# Altium PCB QiCharger.PcbDoc
Units mm, origin at the board's own origin, x right, y up, seen from the top; angles counter-clockwise.
Board outline 35 x 55 mm, 2 copper layers (Top Layer, Bottom Layer); 38 components, 20 nets, 82 pads, 20 vias.
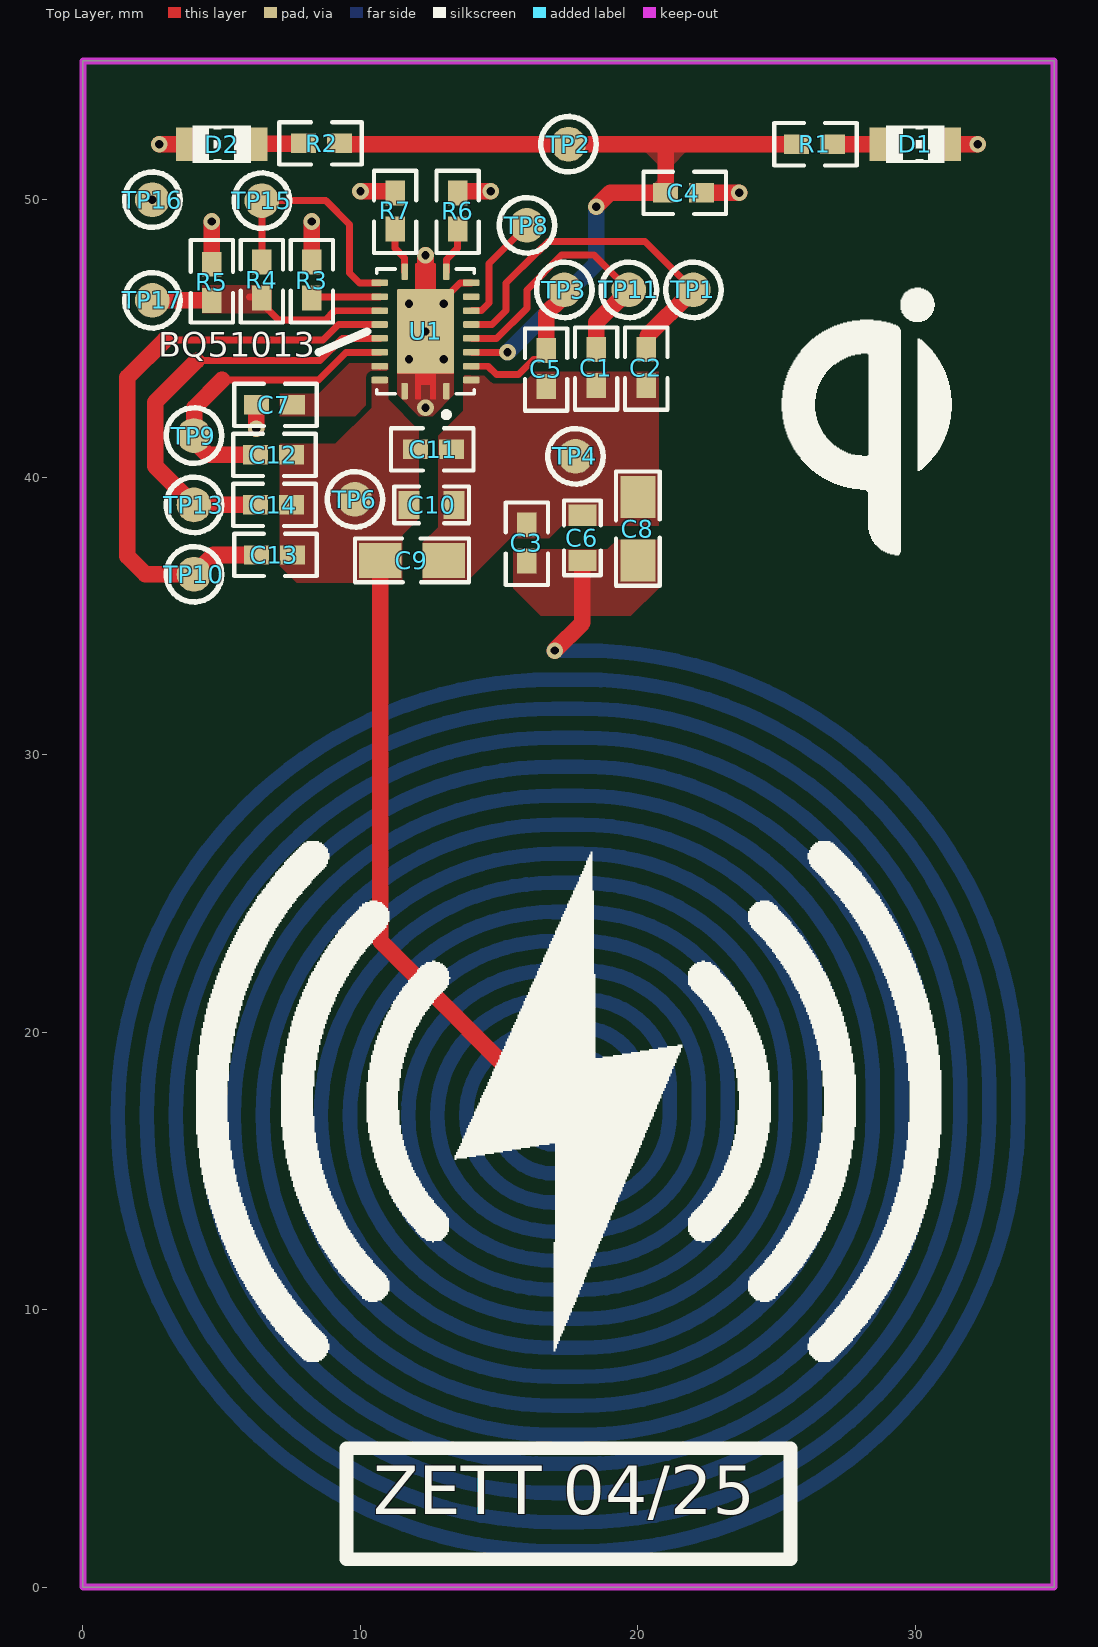
[diagram p0: Top Layer view]
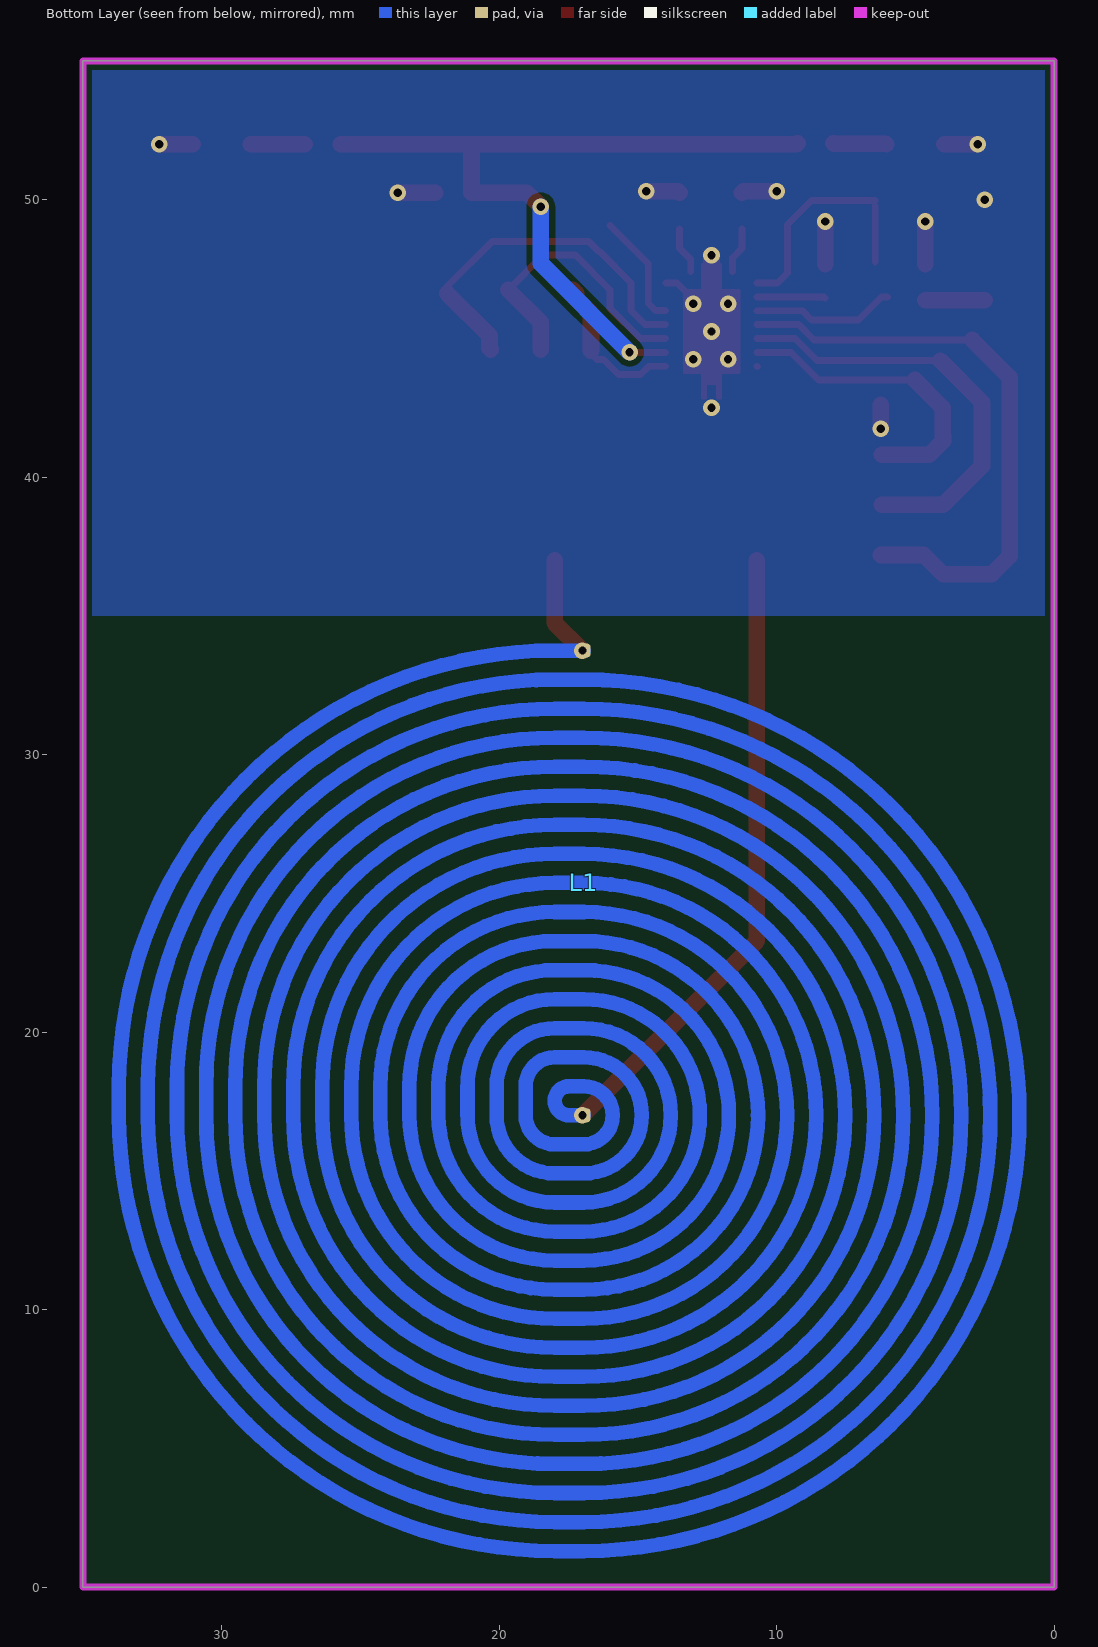
[diagram p1: Bottom Layer view, seen from below]
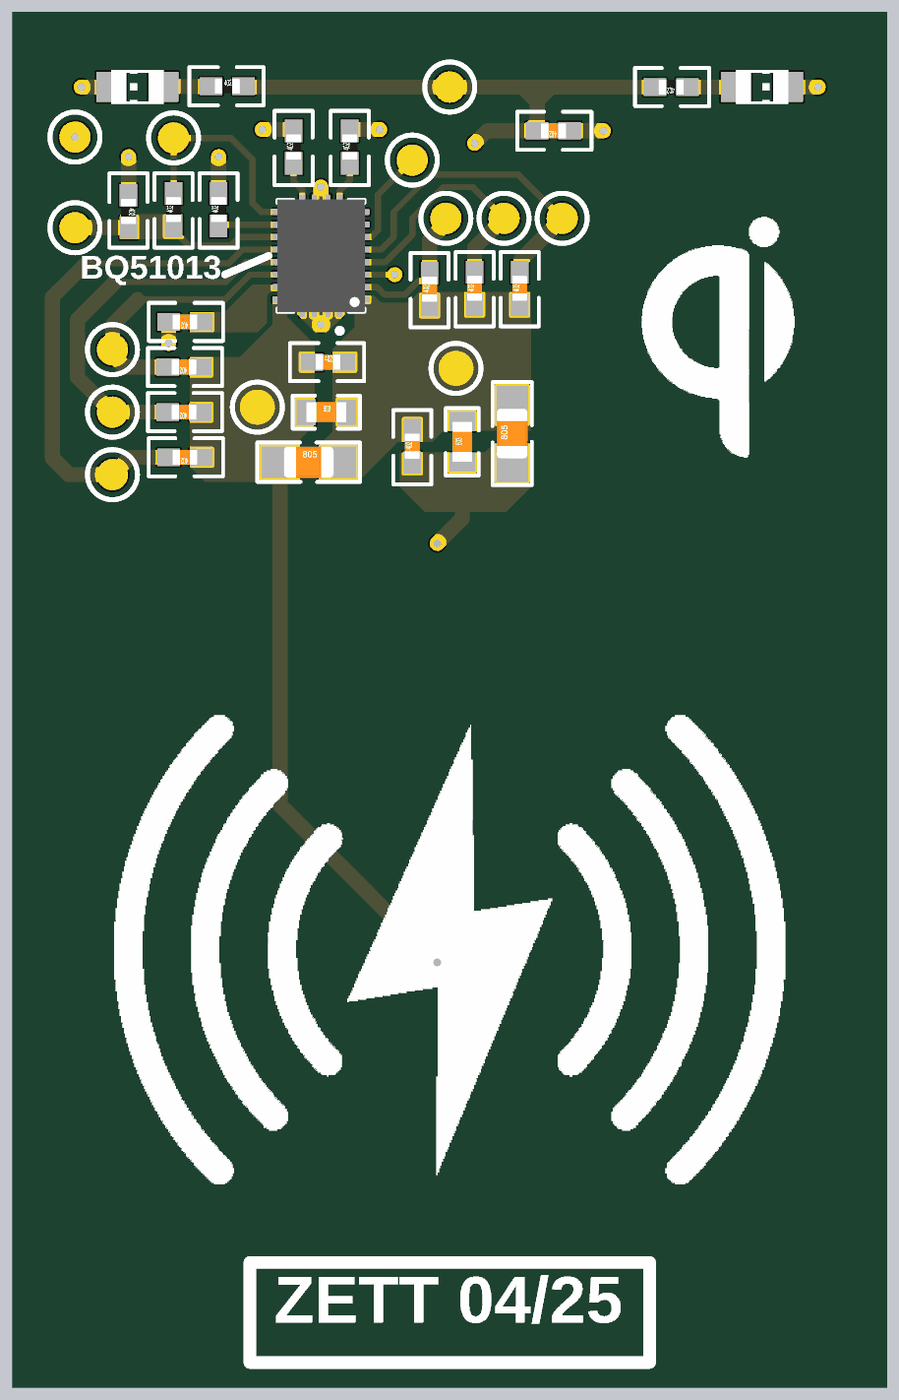
[diagram p2: 3D render of the assembled board from above, using the file's embedded part models]

## Layer stack, top to bottom
Top Solder: solder mask 0.0102, Solder Resist, Dk 3.5
Top Layer: signal copper 0.0356
Dielectric 1: dielectric 0.32, FR-4, Dk 4.8
Bottom Layer: signal copper 0.0356
Bottom Solder: solder mask 0.0102, Solder Resist, Dk 3.5

## Board outline
0,0 0,55 35,55 35,0

## Design rules (kind name [scope] priority, off if disabled: settings)
BoardOutlineClearance [All] p1: gap=0.2 ignorepadtopadclearanceinfootprint=FALSE
Clearance [All] p1: gap=0.203 ignorepadtopadclearanceinfootprint=FALSE except(0.25: Arc-Hole Track-Hole SMDPad-Hole THPad-Hole Via-Hole Fill-Hole Poly-Hole Region-Hole Text-Hole)
ComponentClearance [All] p1: gap=0.127 collisioncheckmode=3 verticalgap=0.127 showdistances=TRUE
DiffPairsRouting [All] p1: maxlimit=0.381 minlimit=0.203 mostfreqgap=0.203 toplayer_minwidth=0.203 toplayer_maxwidth=25.4 toplayer_prefwidth=0.203 bottomlayer_minwidth=0.203 bottomlayer_maxwidth=25.4 bottomlayer_prefwidth=0.203 maxuncoupledlength=12.7
Height [All] p1: minheight=0 maxheight=1816.048 prefheight=12.7
HoleSize [All] p1: absolutevalues=TRUE maxlimit=6.3 minlimit=0.3 maxpercent=80.000 minpercent=20.000
HoleToHoleClearance [All] p1: gap=0.25 allowstackedmicrovias=FALSE
MinimumAnnularRing [All] p1: minimumring=0.076
MinimumSolderMaskSliver [All] p1: minsoldermaskwidth=0
PlaneClearance [All] p1: clearance=0.203
PlaneConnect PlaneConnectPowerPads [InPadClass('PowerPads')] p1: planeconnectstyle=Direct reliefexpansion=0.508 reliefentries=4 reliefconductorwidth=0.254 reliefairgap=0.254
PlaneConnect [All] p2: pad.planeconnectstyle=Relief pad.reliefexpansion=0.3 pad.reliefentries=4 pad.reliefconductorwidth=0.203 pad.reliefairgap=0.203 via.planeconnectstyle=Direct via.reliefexpansion=0.3 via.reliefentries=4 via.reliefconductorwidth=0.127 via.reliefairgap=0.127
PolygonConnect PolygonConnectPowerPads [All vs (InPadClass('PowerPads'))] p1: connectstyle=Direct reliefconductorwidth=0.254 reliefentries=4 polygonreliefangle="90 Angle" airgapwidth=0.254
PolygonConnect [All] p2: connectstyle=Direct reliefconductorwidth=0.203 reliefentries=4 polygonreliefangle="90 Angle" airgapwidth=0.203
RoutingVias [All] p1: holewidth=0.3 width=0.6 viastyle="Through Hole" minholewidth=0.3 minwidth=0.6 maxholewidth=0.6 maxwidth=6.6
SilkToSilkClearance [All] p1: silktosilkclearance=0
SilkToSolderMaskClearance [IsPad] p1: minsilkscreentomaskgap=0.127 clearancetoexposedcopper=TRUE
SolderMaskExpansion [All] p1: expansion=0.075 istentingtop=FALSE
SupplyNets "Schematic Supply Nets" [InNet('GND')] p1: voltage=0.000
Width [All] p1: maxlimit=25.4 minlimit=0.203 preferedwidth=0.203 minimp=50.000000 maximp=50.000000 favimp=50.000000
20 further rules are at their usual default settings.

## Components (designator, comment, footprint, x,y, rotation, side; value= is the part's Value field where it differs from the comment)
C1 "0.47uF" C_SMD_C0402 18.496,43.315 r90 top
C2 "47nF" C_SMD_C0402 20.3,43.315 r90 top
C3 "###" C_SMD_C0402 16,37 r90 top
C4 "4.7uF" C_SMD_C0402 22.285,50.25 r180 top
C5 "10nF" C_SMD_C0402 16.693,43.28 r90 top
C6 "###" C_SMD_C0603 18,37 r90 top
C7 "4.7uF" C_SMD_C0402 7.535,42.607 r180 top
C8 "###" C_SMD_C0805 20,37 r90 top
C9 "###" C_SMD_C0805 10.714,37 r0 top
C10 "###" C_SMD_C0603 11.75,39 r0 top
C11 "###" C_SMD_C0402 11.992,41 r0 top
C12 "10nF" C_SMD_C0402 7.5,40.804 r180 top
C13 "47nF" C_SMD_C0402 7.535,37.196 r180 top
C14 "0.47uF" C_SMD_C0402 7.5,39 r180 top locked
D1 "SMD LED RED" SMD_0805_CHIP-LED 30,52 r270 top
D2 "SMD LED RED" SMD_0805_CHIP-LED 5,52 r90 top
L1 "Trace Coil" PCBComponent_1 16.953,17 r180 bottom
R1 "220R" R_SMD_R0402 27,52 r180 top
R2 "220R" R_SMD_R0402 7.965,52.03 r0 top
R3 "10k" R_SMD_R0402 8.25,46.465 r90 top
R4 "###" R_SMD_R0402 6.446,46.465 r90 top
R5 "140" R_SMD_R0402 4.643,47.659 r270 top
R6 "0R" R_SMD_R0402 13.5,48.965 r90 top
R7 "0R" R_SMD_R0402 11.25,48.965 r90 top
TP1 "TESTPOINT" TP_1.25MM 22,46.75 r0 top
TP2 "TESTPOINT" TP_1.25MM 17.5,52 r0 top
TP3 "TESTPOINT" TP_1.25MM 17.345,46.75 r0 top
TP4 "TESTPOINT" TP_1.25MM 17.75,40.75 r0 top
TP6 "TESTPOINT" TP_1.25MM 9.8,39.2 r0 top
TP8 "TESTPOINT" TP_1.25MM 16,49.077 r0 top
TP9 "TESTPOINT" TP_1.25MM 4,41.5 r180 top
TP10 "TESTPOINT" TP_1.25MM 4,36.5 r90 top
TP11 "TESTPOINT" TP_1.25MM 19.672,46.75 r90 top
TP13 "TESTPOINT" TP_1.25MM 4,39 r270 top
TP15 "TESTPOINT" TP_1.25MM 6.446,49.965 r90 top
TP16 "TESTPOINT" TP_1.25MM 2.5,50 r90 top
TP17 "TESTPOINT" TP_1.25MM 2.5,46.374 r90 top
U1 "BQ51013ARHLT" IC_MSP430FR2522IRHLR 12.345,45.253 r180 top

## Footprints (in the part's own frame and the unit in brackets; to place one, negate y for a bottom-side part, rotate by r counter-clockwise, add the part's x,y. Pads: shape width x height; smd on the part's side, far side on the other; paste and mask are expansions set on the pad)
C_SMD_C0402 [mm] "SMD, 0402"
  rect 0.9x0.7 smd: 1(-0.015,0) 2(1.285,0)
  silkscreen extent -0.89,-0.76 2.08,0.76, body extent 0.14,-0.3 1.14,0.3, height 0.2
C_SMD_C0603 [mil] "SMD, 0603"
  rect 30x40 smd: 1(0,0) 2(64,0)
  silkscreen extent -21,-26 85,26, body extent 1,-16 64,16, height 12
C_SMD_C0805 [mil] "SMD, 0805"
  rect 60x50 smd: 1(0,0) 2(90,0)
  silkscreen extent -36,-31 126,31, body extent 6,-25 84,25, height 31
IC_MSP430FR2522IRHLR [mm]
  rrect42% 0.24x0.6 smd: 1(-0.75,2.15) 10(-0.75,-2.15) 11(0.75,-2.15) 20(0.75,2.15)
  rrect42% 0.6x0.24 smd: 2(-1.65,1.75) 3(-1.65,1.25) 4(-1.65,0.75) 5(-1.65,0.25) 6(-1.65,-0.25) 7(-1.65,-0.75) 8(-1.65,-1.25) 9(-1.65,-1.75) 12(1.65,-1.75) 13(1.65,-1.25) 14(1.65,-0.75) 15(1.65,-0.25) 16(1.65,0.25) 17(1.65,0.75) 18(1.65,1.25) 19(1.65,1.75)
  rrect5% 2.05x3.05 smd paste-3: 21(0,0)
  Top Layer region: 381 vertices and 0 holes, not listed, extent -1.025,-2.45 1.025,2.45
  silkscreen extent -1.75,-2.25 1.75,3.1, body extent -1.75,-2.25 1.75,2.25, height 1
PCBComponent_1 [mm]
  rrect50% 0.5x0.5 smd: 1(0,16.752) 2(0,0)
  Top Layer lines w0.524: 0,0 -0.523,0 cw(c-0.523,0.001) -0.524,0.001 cw(c-0.524,0.524) -0.525,1.047 ccw(c-0.525,1.047) -0.525,1.047 0,1.047 cw(c0,0) 1.047,0 cw(c0,0) 0,-1.047 -1.047,-1.047 cw(c-1.047,0) -2.094,0 -2.094,1.047 cw(c-1.047,1.047) -1.047,2.094 0,2.094 cw(c0,0) 2.094,0 cw(c0,0) 0,-2.094 -1.047,-2.094 cw(c-1.047,0) -3.141,0 -3.141,1.047 cw(c-1.047,1.047) -1.047,3.141 0,3.141 cw(c0,0) 3.141,0 cw(c0,0) 0,-3.141 -1.047,-3.141 cw(c-1.047,0) -4.188,0 -4.188,1.047 cw(c-1.047,1.047) -1.047,4.188 0,4.188 cw(c0,0) 4.188,0 cw(c0,0) 0,-4.188 -1.047,-4.188 cw(c-1.047,0) -5.235,0 -5.235,1.047 cw(c-1.047,1.047) -1.047,5.235 0,5.235 cw(c0,0) 5.235,0 cw(c0,0) 0,-5.235 -1.047,-5.235 cw(c-1.047,0) -6.282,0 -6.282,1.047 cw(c-1.047,1.047) -1.047,6.282 0,6.282 cw(c0,0) 6.282,0 cw(c0,0) 0,-6.282 -1.047,-6.282 cw(c-1.047,0) -7.329,0 -7.329,1.047 cw(c-1.047,1.047) -1.047,7.329 0,7.329 cw(c0,0) 7.329,0 cw(c0,0) 0,-7.329 -1.047,-7.329 cw(c-1.047,0) -8.376,0 -8.376,1.047 cw(c-1.047,1.047) -1.047,8.376 0,8.376 cw(c0,0) 8.376,0 cw(c0,0) 0,-8.376 -1.047,-8.376 cw(c-1.047,0) -9.423,0 -9.423,1.047 cw(c-1.047,1.047) -1.047,9.423 0,9.423 cw(c0,0) 9.423,0 cw(c0,0) 0,-9.423 -1.047,-9.423 cw(c-1.047,0) -10.47,0 -10.47,1.047 cw(c-1.047,1.047) -1.047,10.47 ; 0,16.752 -0.047,16.752 -1.047,16.752 ccw(c-1.047,1.047) -16.752,1.047 -16.752,0 ccw(c-1.047,0) -1.047,-15.705 0,-15.705 ccw(c0,0) 15.705,0 ccw(c0,0) 0,15.705 -1.047,15.705 ccw(c-1.047,1.047) -15.705,1.047 -15.705,0 ccw(c-1.047,0) -1.047,-14.658 0,-14.658 ; 0,-14.658 cw(c0,-14.658) 0,-14.658 ; 0,-14.658 ccw(c0,0) 14.658,0 ccw(c0,0) 0,14.658 -1.047,14.658 ccw(c-1.047,1.047) -14.658,1.047 -14.658,0 ccw(c-1.047,0) -1.047,-13.611 0,-13.611 ccw(c0,0) 13.611,0 ccw(c0,0) 0,13.611 -1.047,13.611 ccw(c-1.047,1.047) -13.611,1.047 -13.611,0 ; -1.047,10.47 cw(c-1.047,10.47) -1.047,10.47 ; -1.047,10.47 0,10.47 cw(c0,0) 10.47,0 cw(c0,0) 0,-10.47 -1.047,-10.47 cw(c-1.047,0) -11.517,0 -11.517,1.047 cw(c-1.047,1.047) -1.047,11.517 0,11.517 cw(c0,0) 11.517,0 cw(c0,0) 0,-11.517 -1.047,-11.517 cw(c-1.047,0) -12.564,0 -12.564,1.047 cw(c-1.047,1.047) -1.047,12.564 0,12.564 cw(c0,0) 12.564,0 cw(c0,0) 0,-12.564 -1.047,-12.564 cw(c-1.047,0) -13.611,0 ; -13.611,0 cw(c-13.611,0) -13.611,0
R_SMD_R0402 [mm] "SMD, 0402"
  rect 0.9x0.7 smd: 1(-0.015,0) 2(1.285,0)
  silkscreen extent -0.89,-0.76 2.08,0.76, body extent 0.14,-0.3 1.14,0.3, height 0.2
SMD_0805_CHIP-LED [mm]
  rect 1.2x1.2 smd: A(0,-1.05) K(0,1.05)
  silkscreen extent -0.68,-1.05 0.67,1.05
TP_1.25MM [mm] "Test Point 1.25mm (~49mil)"
  round 1.25 smd paste-0.625: 1(0,0)
  silkscreen extent -1,-1 1,1

## Part data
C1 C2 C3 C4 C5 C6 C7 C8 C9 C10 C11 C12 C13 C14: library part C_SMD, "SMD Capacitor", Rated Voltage=25V, LatestRevisionDate=07-Sep-2019, Published=21-Feb-2011, Usage="only permitted for non-commercial purposes at HTL I Innsbruck"
D1 D2: library part SMD_LED_RED, "Red GaAs LED (Vf=1.7V, If=40mA)", LatestRevisionDate=21-Jun-2015, Published=29-Mar-2017, SimulationModellSource="Miscellaneous Devices", Usage="only permitted for non-commercial purposes at HTL I Innsbruck"
L1: "roughly 4uH; trace width of 0.4mm"
R1 R2 R3 R4 R5 R6 R7: library part R_SMD, "SMD Resistor", LatestRevisionDate=07-Sep-2019, Published=21-Feb-2011, Usage="only permitted for non-commercial purposes at HTL I Innsbruck"
TP1 TP2 TP3 TP4 TP6 TP8 TP9 TP10 TP11 TP13 TP15 TP16 TP17: library part "TP TEST POINT", "Test Point", Published=03-Aug-2024, Publisher="Michael Kupfner", Usage="Only permitted in classes taught by Prof. Michael Kupfner, HTBLVA Anichstrasse"
U1: "Integrated Wireless power Receiver Solution, Qi (Wireless power Consortium) Compliant 20-VQFN 0 to 125", Package="VQFN-20 Texas Instruments", Availability=Warning, Check_prices=https://www.snapeda.com/parts/BQ51013ARHLT/Texas%20Instruments/view-part/134659/?ref=eda, MF="Texas Instruments", MP=BQ51013ARHLT, Price=None, Purchase-URL=https://pricing.snapeda.com/search/part/BQ51013ARHLT/?ref=eda, SnapEDA_Link=https://www.snapeda.com/parts/BQ51013ARHLT/Texas%20Instruments/view-part/134659/?ref=snap

## Via types
v1: diameter 0.6, hole 0.3, Top Layer to Bottom Layer, 20 vias

## Nets (pads, with @x,y where several pads share a name; then routed paths per layer and width w, separated by ;. In a path a pad name is that pad's centre, name@x,y a point inside that pad or via, vN(x,y) a via of type N, cw(c..) or ccw(c..) an arc to the next point about the centre after c; other vN are vias at no path point)
A_D1: D1.A R1.1 | length 1.9
  Top Layer w0.6: R1.1 D1.A
A_D2: D2.A R2.1 | length 1.9
  Top Layer w0.6: D2.A 6.065,52.015 7.935,52.015 R2.1
AC1: C1.1 C2.1 C3.2 C5.1 C6.2 C8.2 C9.2 C10.2 C11.2 TP4.1 U1.2
AC1_1: C3.1 C6.1 C8.1 L1.1 | length 3.7
  Top Layer w0.6: v1(17,33.75) 18,34.75 C6.1
AC2: C9.1 C10.1 C11.1 C12.1 C13.1 C14.1 L1.2 TP6.1 U1.19 | length 22.6
  Top Layer w0.6: C9.1 10.714,23.286 v1(17,17)
BOOT1: C5.2 TP3.1 U1.3 | length 5.7
  Top Layer w0.25: U1.3@14,43.998 14.602,43.998 14.9,43.7 15.7,43.7 16.24,44.24 16.468,44.24 16.693,44.465 C5.2
  Top Layer w0.6: C5.2 16.693,45.893 17.221,46.421 17.221,46.626 TP3.1
BOOT2: C12.2 TP9.1 U1.17 | length 11.1
  Top Layer w0.25: TP9.1 TP9.1@4.012,41.512 ; 5.012,43.5 8.487,43.5 9.485,44.498 U1.17@10.7,44.498
  Top Layer w0.6: TP9.1 4,41.304 4.5,40.804 C12.2 ; TP9.1@4.012,41.512 4.012,42.5 5.012,43.5
CLAMP1: C1.2 TP11.1 U1.5 | length 10.5
  Top Layer w0.25: U1.5@14,44.998 14.909,44.998 16,46.088 16,46.753 17.247,48 18.422,48 TP11.1
  Top Layer w0.6: C1.2 18.496,45.574 TP11.1
CLAMP2: C14.2 TP13.1 U1.16 | length 15.6
  Top Layer w0.25: 4.1,44.2 8.546,44.2 9.344,44.998 10.7,44.998 U1.16@10.695,44.993
  Top Layer w0.6: 4.1,44.2 2.6,42.7 2.6,40.4 TP13.1 C14.2
COM1: C2.2 TP1.1 U1.6 | length 13.3
  Top Layer w0.25: U1.6@14,45.498 14.748,45.498 15.25,46 15.25,47 16.374,48.124 16.395,48.124 16.771,48.5 20.25,48.5 21.876,46.874 TP1.1@21.876,46.626
  Top Layer w0.6: C2.2 20.35,44.65 20.35,45.1 TP1.1@21.876,46.626
COM2: C13.2 TP10.1 U1.15 | length 21.5
  Top Layer w0.25: 2.951,44.951 8.656,44.951 9.203,45.498 U1.15@10.7,45.498
  Top Layer w0.6: 2.951,44.951 1.6,43.6 1.6,37.15 2.25,36.5 TP10.1 4.696,37.196 C13.2
EN1: R6.1 U1.10 | length 1.7
  Top Layer w0.25: U1.10 13.095,47.845 13.5,48.25 R6.1
EN2: R7.1 U1.11 | length 1.7
  Top Layer w0.25: R7.1 11.25,48.25 11.595,47.905 U1.11
FOD: R4.1 R5.2 TP17.1 U1.14 | length 7.4
  Top Layer w0.25: R5.2 R5.2@4.719,46.45 ; 6,46.5 6.215,46.5 7.043,45.672 8.736,45.672 9.062,45.998 U1.14@10.7,45.998
  Top Layer w0.6: TP17.1@2.5,46.374 R5.2
GHG: TP8.1 U1.7 | length 4.1
  Top Layer w0.25: U1.7@14,45.998 14.005,46.003 14.36,46.003 14.628,46.271 14.628,47.705 TP8.1
GND: C4.1 C7.2 D1.K D2.K R3.2 R5.1 R6.2 R7.2 TP16.1 U1.1 U1.9 U1.20 U1.21 | length 14.3
  Top Layer w0.25: v1(13,46.25) 13,46.408 13.59,46.998 13.99,46.998 U1.9
  Top Layer w0.6: v1(2.75,52) D2.K ; R5.1@4.643,47.674 v1(4.643,49.215) ; v1(6.25,41.75) C7.2 ; R3.2@8.25,47.674 v1(8.25,49.215) ; v1(10,50.3) 11.2,50.3 R7.2 ; v1(12.345,45.253) v1(12.345,48) ; R6.2 13.55,50.3 v1(14.7,50.3) ; C4.1 v1(23.65,50.25) ; D1.K v1(32.25,52)
  other v1: 12.345,42.5 11.75,44.25 13,44.25 11.75,46.25 2.5,50
ILIM: R4.2 TP15.1 U1.12 | length 8.5
  Top Layer w0.25: R4.2 TP15.1@6.446,49.78 ; TP15.1 8.75,49.965 9.606,49.109 9.606,47.359 9.962,47.003 U1.12 U1.12@10.7,46.998
OUT: C4.2 R1.2 R2.2 TP2.1 U1.4 | length 28.8
  Top Layer w0.25: U1.4@14,44.498 14.001,44.499 15.299,44.499 v1(15.3,44.5)
  Top Layer w0.6: R2.2 9.28,52 TP2.1 21,52 ; v1(18.5,49.75) 19,50.25 C4.2 21,52 ; R1.2 21,52
  Bottom Layer w0.6: v1(15.3,44.5) 18.5,47.7 v1(18.5,49.75)
RECT: C7.1 U1.18 | length 0
  Top Layer w0.25: U1.18@10.695,43.993 U1.18@10.7,43.998
TS/CTRL: R3.1 U1.13 | length 2.5
  Top Layer w0.25: R3.1 8.298,46.498 U1.13@10.695,46.498 ; U1.13@10.698,46.5 U1.13@10.695,46.498 ; U1.13@10.7,46.498 U1.13@10.695,46.498
pads on no net: U1.8

## Polygon pours and split planes (outlines as drawn)
GND on Bottom Layer "NONET_L-01_P-001" (solid, remove dead copper, pour order 0): 0,55 35,55 35,35 0,35
GND on Top Layer "NONET_L-01_P-001" (solid, remove dead copper, pour order 20): 11.32,44.6 11.32,42.98 12.1,42.2 12.6,42.2 13.37,42.97 13.37,44.6
RECT on Top Layer "NONET_L-01_P-001" (solid, remove dead copper, pour order 19): 7.1,43 7.1,42.2 10.1,42.2 10.4,42.5 10.4,43.6 11,43.6 11,44.1 9.6,44.1 8.5,43
AC2 on Top Layer "NONET_L-01_P-001" (solid, remove dead copper, pour order 16): 11.5,36.2 11.5,37.9 12.1,38.5 12.1,41.7 11,42.8 11,43.6 10.4,43.6 10.4,42.5 9.1,41.2 7.1,41.2 7.1,36.8 7.7,36.2
OUT on Top Layer "NONET_L-01_P-001" (solid, remove dead copper, pour order 14): 20.25,52.25 20.25,51.75 20.75,51.25 20.75,50.75 20.5,50.5 20.5,50 21.25,50 21.25,51.25 21.75,51.75 21.75,52.25
no net on Top Layer "NONET_L-01_P-001" (solid, remove dead copper, pour order 12): 28,51
FOD on Top Layer "NONET_L-01_P-001" (solid, remove dead copper, pour order 8): 6.8,46.915 4.3,46.915 4.3,45.915 6.8,45.915
AC1 on Top Layer "NONET_L-01_P-001" (solid, remove dead copper, pour order 7): 12.8,41.5 13.7,42.4 13.7,43.8 20.75,43.8 20.75,40.25 12.8,40.25
AC1 on Top Layer "NONET_L-01_P-001" (solid, remove dead copper, pour order 2): 12.8,41.5 12.8,38.2 12.25,37.65 12.25,36.25 13.85,36.25 15.4,37.8 16.8,37.8 17.25,38.25 20.75,38.25 20.75,41.5
AC1_1 on Top Layer "NONET_L-01_P-001" (solid, remove dead copper, pour order 1): 15.5,37.4 18.9,37.4 19.25,37.75 20.75,37.75 20.75,36 19.75,35 16.5,35 15.5,36

## Keep-outs
Keep-Out Layer:
  the board outline again, w0.254

## Silkscreen, mask and mechanical layers (free items; w line width, h text height)
Top Overlay:
  drawing of 15 lines, arcs and shapes, not listed
  text "BQ51013" at 2.708,44.06 h1.5
  text "ZETT 04/25" at 10.464,2.041 h3